# EAGLE board Localuino-v1 (EAGLE 5.07)
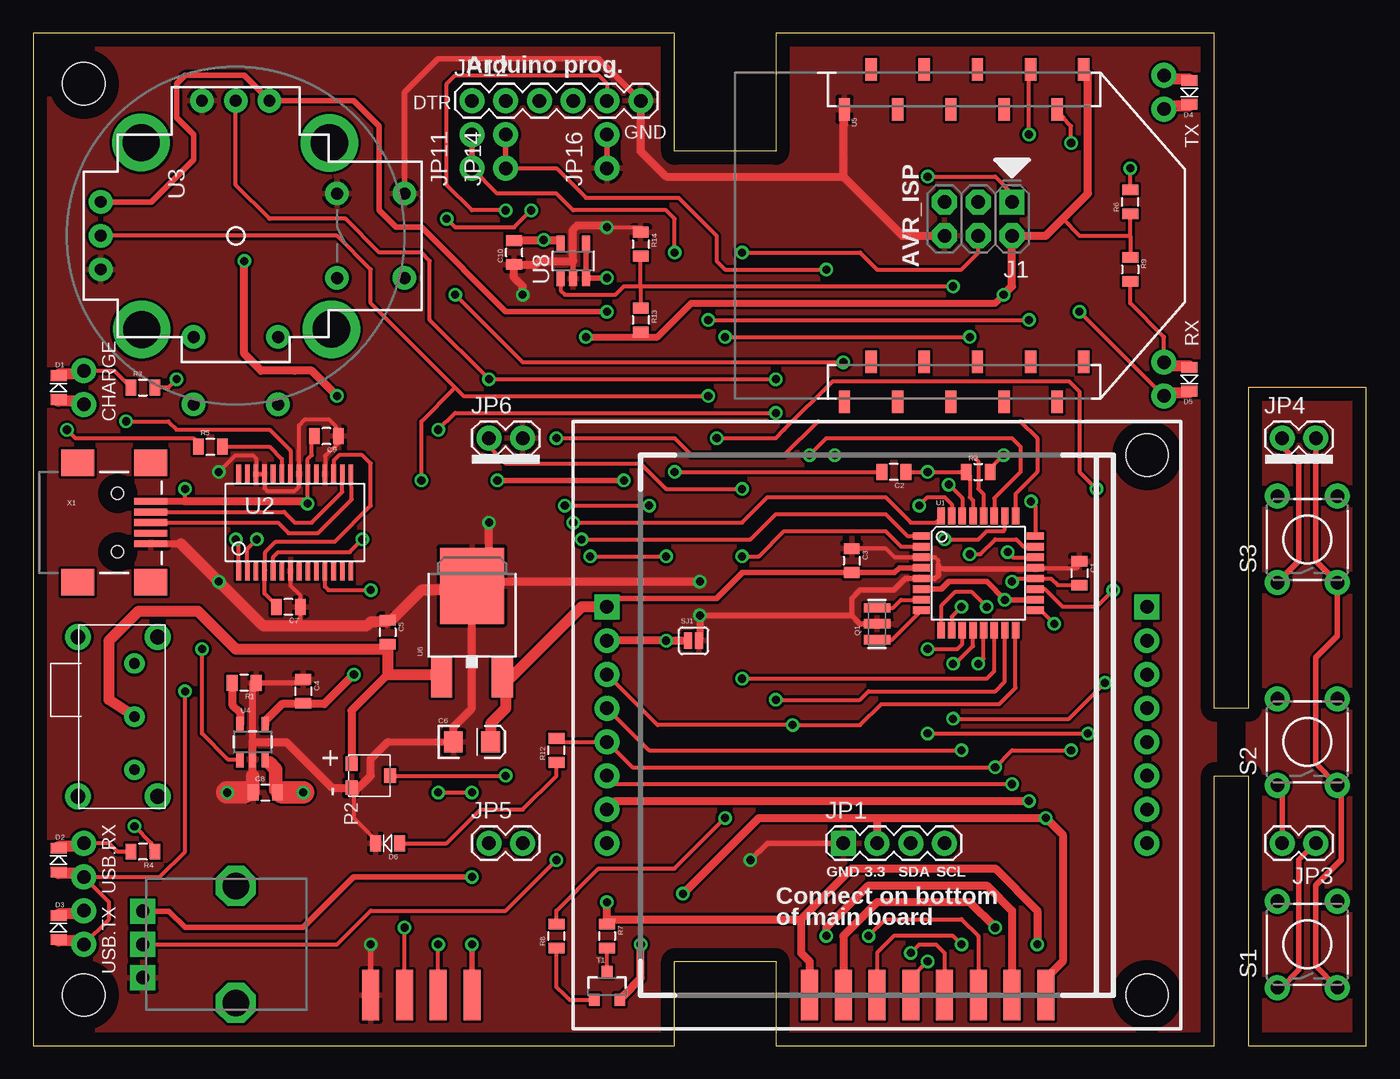
[diagram p0: board, top side]
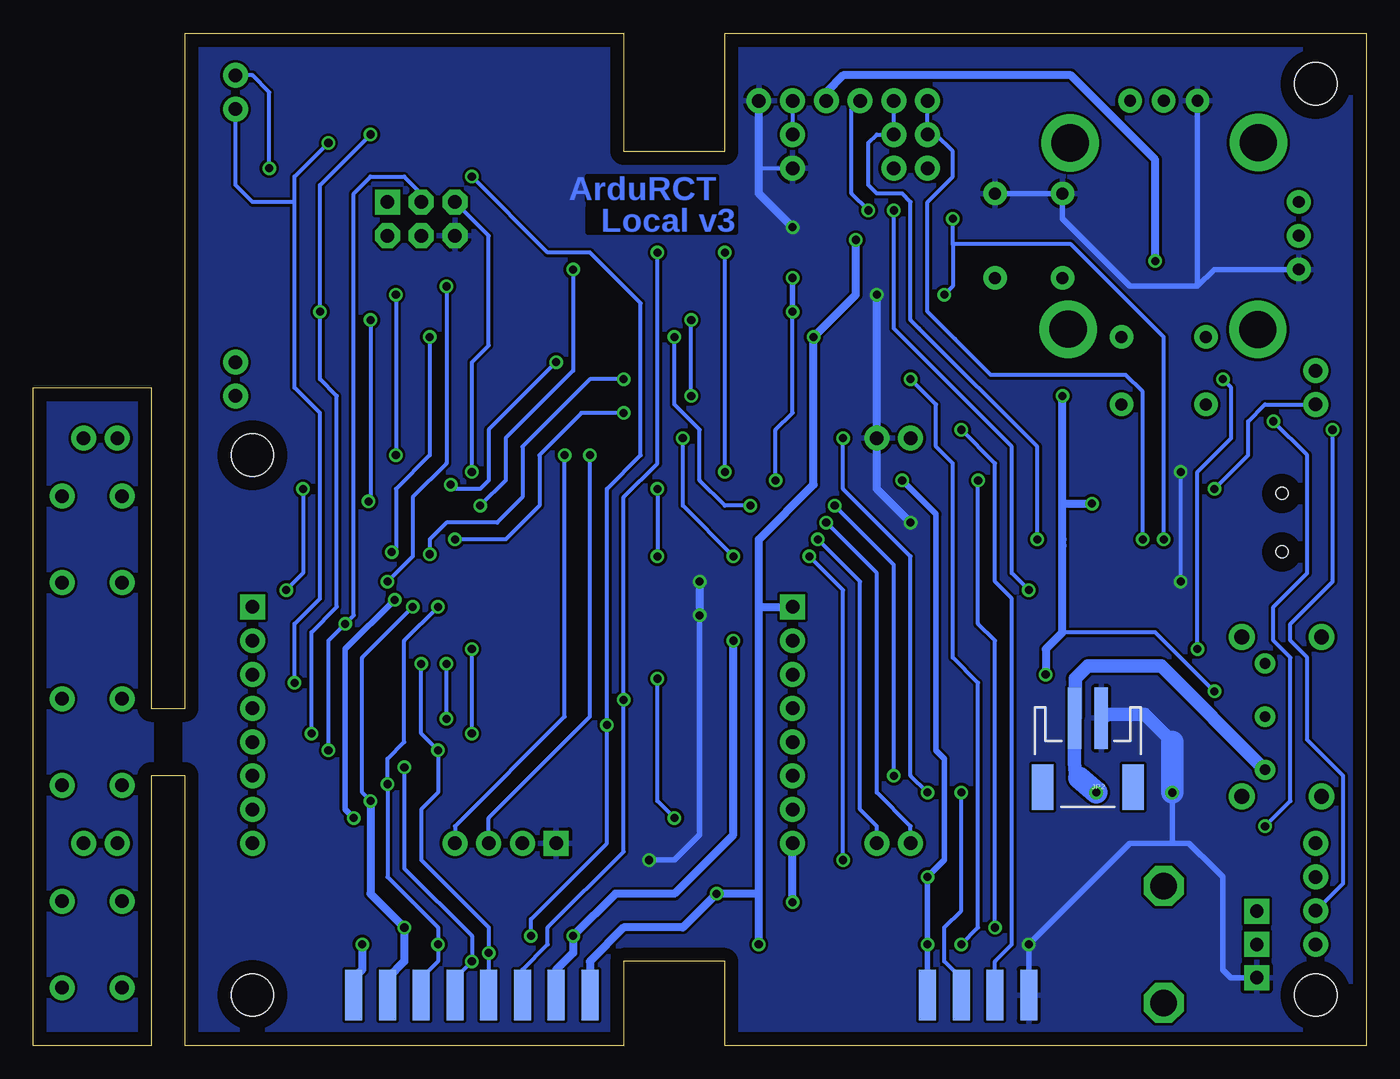
[diagram p1: board, bottom side, seen from below]

Size 100.32 x 76.2 mm. Coordinates in mm from the lower left corner, seen from the top.
Outline: 0,0 48.26,0 48.26,6.35 55.88,6.35 55.88,0 88.9,0 88.9,20.32 91.44,20.32 91.44,0 100.32,0 100.32,49.52 91.44,49.53 91.44,25.4 88.9,25.4 88.9,76.2 55.88,76.2 55.88,67.31 48.26,67.31 48.26,76.19 0,76.19 0,0
Copper layers (1*16): Top 0.035mm / dielectric 1.5mm / Bottom 0.035mm
Design rules "default": minimum track width 10mil, minimum drill 24mil, track to track 8mil, track to pad 8mil, pad to pad 8mil, via to via 8mil, smd to smd 8mil, copper to edge 40mil, drill to drill 8mil, minimum pad ring 10mil, minimum via ring 8mil, stop-mask expansion 4mil, vias tented up to drill 0mil, thermal gap 10mil
Net classes: 0 default: width 0.203 mm; 1 vcc: width 0.254 mm
Holes 3.2 mm at 3.81,72.39 3.81,3.81

## Footprints (pad centres in the part's own frame; a part is rotated, then mirrored left to right if it is on the bottom)
0805 = smd 0.8 x 1.2: 1 -0.9,0; 2 0.9,0
EIA3216 = smd 1.4 x 1.6: A 1.4,0; C -1.4,0
LED = smd 0.8 x 1.2: A -0.9,0; C 0.9,0 | drill 1.016 pad 1.88 round: A1 -1.27,-1.905; C1 1.27,-1.905
LED-0805 = smd 0.8 x 1.2: 1 -0.9,0; 2 0.9,0
2X3-NS = drill 1.016 pad 1.88 square: 1 -2.54,-1.27 | drill 1.016 pad 1.88 octagon: 2 -2.54,1.27; 3 0,-1.27; 4 0,1.27; 5 2.54,-1.27; 6 2.54,1.27
1X04 = drill 1.016 pad 1.88 square: 1 0,0 | drill 1.016 pad 1.88 round: 2 2.54,0; 3 5.08,0; 4 7.62,0
JST-2-SMD = smd 1 x 4.6: 1 -1,-3.7; 2 1,-3.7 | smd 1.6 x 3.4: NC1 -3.4,1.5; NC2 3.4,1.5
1X02 = drill 1.016 pad 1.88 round: 1 0,0; 2 2.54,0
1X8_SMD = smd 1.27 x 3.81: 1 0,0; 2 2.54,0; 3 5.08,0; 4 7.62,0; 5 10.16,0; 6 12.7,0; 7 15.24,0; 8 17.78,0
1X4_SMD = smd 1.27 x 3.81: 1 0,0; 2 2.54,0; 3 5.08,0; 4 7.62,0
1X2_CLOSED = drill 1.016 pad 1.88 round: 1 -1.27,0; 2 1.27,0
1X06 = drill 1.016 pad 1.88 round: 1 0,0; 2 2.54,0; 3 5.08,0; 4 7.62,0; 5 10.16,0; 6 12.7,0
ALPS_POT = drill 1 pad 1.88 square: P$1 7,-2.5; P$2 7,0; P$3 7,2.5 | drill 2 octagon: P$4 0,-4.4; P$5 0,4.4
TRIMPOT_TC33 = smd 1.1 x 0.9: 1 -0.91,-1.45; 2 0,1.45; 3 0.91,-1.45
RESONATOR-SMD = smd 0.7 x 2: 1 -1.2,0; 2 0,0; 3 1.2,0
TACTILE-PTH = drill 1.016 pad 1.88 round: 1 -3.251,2.261; 2 3.251,2.261; 3 -3.251,-2.261; 4 3.251,-2.261
EG1224 = drill 0.8 pad 1.524 round: 1 -4,0; 2 0,0; 3 4,0 | drill 1.1 pad 1.93 round: P$4 6,1.75; P$5 -6,1.75; P$6 -6,-4.25; P$7 6,-4.25
SJ_2S = smd 0.635 x 1.27: 1 -0.412,0; 2 0.412,0
SOT23-3 = smd 0.8 x 0.9: 1 -0.95,-1; 2 0.95,-1; 3 0,1.1
TQFP32-08 = smd 1.27 x 0.559: 1 -4.293,2.8; 2 -4.293,2; 3 -4.293,1.2; 4 -4.293,0.4; 5 -4.293,-0.4; 6 -4.293,-1.2; 7 -4.293,-2; 8 -4.293,-2.8; 17 4.293,-2.8; 18 4.293,-2; 19 4.293,-1.2; 20 4.293,-0.4; 21 4.293,0.4; 22 4.293,1.2; 23 4.293,2; 24 4.293,2.8 | smd 0.559 x 1.27: 9 -2.8,-4.293; 10 -2,-4.293; 11 -1.2,-4.293; 12 -0.4,-4.293; 13 0.4,-4.293; 14 1.2,-4.293; 15 2,-4.293; 16 2.8,-4.293; 25 2.8,4.293; 26 2,4.293; 27 1.2,4.293; 28 0.4,4.293; 29 -0.4,4.293; 30 -1.2,4.293; 31 -2,4.293; 32 -2.8,4.293
SSOP28DB = smd 0.348 x 1.397: 1 -4.225,-3.656; 2 -3.575,-3.656; 3 -2.925,-3.656; 4 -2.275,-3.656; 5 -1.625,-3.656; 6 -0.975,-3.656; 7 -0.325,-3.656; 8 0.325,-3.656; 9 0.975,-3.656; 10 1.625,-3.656; 11 2.275,-3.656; 12 2.925,-3.656; 13 3.575,-3.656; 14 4.225,-3.656; 15 4.225,3.656; 16 3.575,3.656; 17 2.925,3.656; 18 2.275,3.656; 19 1.625,3.656; 20 0.975,3.656; 21 0.325,3.656; 22 -0.325,3.656; 23 -0.975,3.656; 24 -1.625,3.656; 25 -2.275,3.656; 26 -2.925,3.656; 27 -3.575,3.656; 28 -4.225,3.656
JOYSTICK = drill 0.9 pad 1.778 round: B1A -3.175,12.7; B1B 3.175,12.7; B2A -3.175,7.62; B2A1 7.62,3.175; B2A2 12.7,3.175; B2A3 7.62,-3.175; B2A4 12.7,-3.175; B2B 3.175,7.62 | drill 0.889 pad 1.778 round: H1 -2.54,-10.16; H2 0,-10.16; H3 2.54,-10.16; V1 -10.16,2.54; V2 -10.16,0; V3 -10.16,-2.54 | drill 2.8 pad 4.318 round: P$1 7.061,-7.074; P$2 7.036,7.201; P$3 -6.985,7.048; P$4 -7.01,-7.125
SOT23-5 = smd 0.55 x 1.2: 1 -0.95,-1.3; 2 0,-1.3; 3 0.95,-1.3; 4 0.95,1.3; 5 -0.95,1.3
XBEE-SMD = smd 1.7 x 0.85: 1 -12.5,20; 2 -9.5,18; 3 -12.5,16; 4 -9.5,14; 5 -12.5,12; 6 -9.5,10; 7 -12.5,8; 8 -9.5,6; 9 -12.5,4; 10 -9.5,2; 11 12.5,2; 12 9.5,4; 13 12.5,6; 14 9.5,8; 15 12.5,10; 16 9.5,12; 17 12.5,14; 18 9.5,16; 19 12.5,18; 20 9.5,20
DPAK = smd 1.6 x 3: 1 -2.28,-5.31; 3 2.28,-5.31 | smd 4.826 x 5.715: 2 0,1.588
PCD8544 = drill 1.016 pad 1.88 square: 1 -8.89,-19.05; P1 -8.89,21.59 | drill 1.016 pad 1.88 round: 2 -6.35,-19.05; 3 -3.81,-19.05; 4 -1.27,-19.05; 5 1.27,-19.05; 6 3.81,-19.05; 7 6.35,-19.05; 8 8.89,-19.05; P2 -6.35,21.59; P3 -3.81,21.59; P4 -1.27,21.59; P5 1.27,21.59; P6 3.81,21.59; P8 8.89,21.59; P17 6.35,21.59 | hole 3.2: -20.32,21.59; 20.32,21.59
SOT23-5' = smd 0.6 x 1.2: 1 -0.95,-1.306; 2 0,-1.306; 3 0.95,-1.306; 4 0.95,1.306; 5 -0.95,1.306
USB-MINIB = smd 2.5 x 0.5: D+ 2.5,0; D- 2.5,0.8; GND 2.5,-1.6; ID 2.5,-0.8; VBUS 2.5,1.6 | smd 2.5 x 2: MTN1 -3,4.5; MTN2 2.5,4.5; MTN3 -3,-4.5; MTN4 2.5,-4.5 | hole 0.9: 0,2.2; 0,-2.2

## Placement (x,y rotation side)
C1  0.1uF  [0805]  78.74,35.56 270 top
C2  0.1uF  [0805]  64.77,43.18 180 top
C3  0.1uF  [0805]  61.59,36.51 270 top
C4  4.7uF  [0805]  20.32,26.67 270 top
C5  4.7uF  [0805]  26.67,31.11 270 top
C6  10uF  [EIA3216]  33.02,22.86 0 top
C7  0.1uF  [0805]  19.21,33.02 180 top
C8  4.7uF  [0805]  17.46,19.05 0 top
C9  0.1uF  [0805]  22.07,45.88 180 top
C10  0.1uF  [0805]  36.2,59.69 90 top
D1  Amber  [LED]  1.91,49.53 90 top
D2  Red  [LED]  1.91,13.97 90 top
D3  Green  [LED]  1.91,8.89 90 top
D4  Green  [LED]  87,71.75 270 top
D5  Red  [LED]  87,50.16 270 top
D6  Red  [LED-0805]  26.67,15.24 180 top
J1  AVR_SPI  [2X3-NS]  71.12,62.23 180 top
JP1  [1X04]  60.96,15.24 0 top
JP2  BAT  [JST-2-SMD]  20.95,20.95 180 bottom
JP3  [1X02]  96.52,15.24 180 top
JP4  [1X02]  93.98,45.72 0 top
JP5  [1X02]  34.29,15.24 0 top
JP6  [1X02]  34.29,45.72 0 top
JP7  BOTTOM  [1X8_SMD]  58.42,3.81 180 bottom
JP8  TOP  [1X8_SMD]  58.42,3.81 0 top
JP9  BOTTOM  [1X4_SMD]  33.02,3.81 0 bottom
JP10  TOP  [1X4_SMD]  33.02,3.81 180 top
JP11  JP_2_CLOSED  [1X2_CLOSED]  33.02,67.31 90 top
JP12  [1X06]  33.02,71.12 0 top
JP14  JP_2_CLOSED  [1X2_CLOSED]  35.56,67.31 90 top
JP16  JP_2_CLOSED  [1X2_CLOSED]  43.18,67.31 90 top
P1  [ALPS_POT]  15.24,7.62 180 top
P2  47K  [TRIMPOT_TC33]  25.4,20.32 270 top
Q1  8MHz  [RESONATOR-SMD]  63.5,31.75 90 top
R1  2K  [0805]  15.88,27.3 180 top
R2  10K  [0805]  71.12,43.18 0 top
R3  10K  [0805]  8.26,49.53 0 top
R4  1K  [0805]  8.26,14.61 180 top
R5  1K  [0805]  13.34,45.09 0 top
R6  1K  [0805]  82.55,63.5 90 top
R7  60  [0805]  43.18,8.26 270 top
R8  1K  [0805]  39.37,8.26 90 top
R9  1K  [0805]  82.55,58.42 270 top
R12  1K  [0805]  39.37,22.23 90 top
R13  10K  [0805]  45.72,54.61 270 top
R14  4K7  [0805]  45.72,60.33 270 top
S1  [TACTILE-PTH]  95.89,7.62 90 top
S2  [TACTILE-PTH]  95.89,22.86 90 top
S3  [TACTILE-PTH]  95.89,38.1 90 top
S4  EG1224  [EG1224]  7.62,24.77 270 top
SJ1  [SJ_2S]  49.69,30.48 0 top
T1  MMBT3906  [SOT23-3]  43.18,4.45 0 top
U1  ATMEGA368  [TQFP32-08]  71.12,35.56 0 top
U2  FT232RL-BASICSSOP  [SSOP28DB]  19.68,39.37 0 top
U3  JOYSTICKPTH  [JOYSTICK]  15.24,60.96 270 top
U4  MCP73831  [SOT23-5]  16.51,22.86 0 top
U5  XBEE-SIMPLE  [XBEE-SMD]  59.05,60.96 270 top
U6  LD39080DT33  [DPAK]  33.02,33.02 0 top
U7  PCD8544  [PCD8544]  62.23,24.13 270 top
U8  LMV321M5  [SOT23-5']  40.64,59.05 0 top
X1  USBSMD  [USB-MINIB]  6.35,39.37 0 top

## Library data of the parts
C1-C10 J1 JP1-JP6 JP12 P1 P2 Q1 R1-R9 R12-R14 S1-S3 SJ1 U1 U4 X1 = SparkFun
D1-D6 JP7-JP11 JP14 JP16 S4 T1 U2 U3 U5-U7 = wibauxl
U8 = linear

## Nets
3.3V: C3.2 C6.A C10.2 J1.2 JP1.2 JP7.1 JP8.8 R2.2 R6.1 R9.1 R13.2 T1.2 U1.4 U1.6 U1.18 U5.1 U6.3 U7.1 U8.5
A0: JP10.2 U1.23 U3.V2
A1: JP10.3 U1.24 U3.H2
A2: JP9.2 U1.25
A3: JP9.3 U1.26
A6: P1.P$2 U1.19
A7: P2.2 U1.22
AREF: C1.2 R13.1 R14.2 U1.20 U8.1
BAT_CH: C8.2 JP2.2 S4.3 U4.3
BL: JP7.8 JP8.1 R7.1 U7.8
BL_CMD: R8.2 U1.14
BUT_1: JP5.1 U1.32
BUT_2: JP5.2 U1.1
BUT_3: JP6.1 U1.2
DC/SCK: J1.3 JP7.5 JP8.4 R12.2 U1.17 U7.5
DIN: JP7.6 JP8.3 U1.10 U7.6
DTR: C2.2 JP11.1
GND [vcc]: C1.1 C3.1 C4.1 C5.1 C6.C C7.1 C8.1 C9.1 C10.1 D6.2 J1.6 JP1.1 JP2.1 JP6.2 JP9.4 JP10.4 JP12.6 JP16.1 P1.P$3 P2.3 Q1.2 R1.1 R14.1 SJ1.2 U1.3 U1.5 U1.21 U2.7 U2.18 U2.21 U2.25 U2.26 U3.B1A U3.B2A U3.H3 U3.V3 U4.2 U5.10 U6.2 U8.2 X1.GND
GND_BUTTONS: JP4.2 S1.3 S2.3 S3.3
GND_LCD [vcc]: JP7.2 JP8.7 SJ1.1 U7.2
N$1: Q1.1 U1.8
N$2: Q1.3 U1.7
N$3: JP3.1 S1.1
N$4: JP3.2 S2.1
N$5: JP4.1 S3.1
N$7: D6.1 R12.1
N$8: D1.C1 R3.1
N$9: U2.15 X1.D+
N$10: U2.16 X1.D-
N$12: R3.2 U4.1
N$13: R1.2 U4.5
N$14: D5.A1 R9.2
N$17: R7.2 T1.3
N$18: R5.2 U2.23
N$19: C7.2 U2.4 U2.17
N$22: R4.1 U2.22
N$25: D4.A1 R6.2
N$27: R8.1 T1.1
RESET: C2.1 J1.5 R2.1 U1.29
RST: JP7.4 JP8.5 U1.13 U7.4
SCE1/MISO: J1.1 JP8.6 U1.16 U7.3
SCE2/MOSI: J1.4 JP7.3 U1.15
SCL: JP1.4 U1.28
SCLK: JP7.7 JP8.2 U1.9 U7.7
SDA: JP1.3 U1.27
TX: JP14.1 U1.31
U_CTS: JP12.5 JP16.2 U2.11
U_DTR: JP11.2 JP12.1 U2.2
U_RX: JP12.2 JP14.2 U2.5
U_RX_LED: D2.C1 R4.2
U_TX: JP12.3 U1.30 U2.1
U_TX_LED: D3.C1 R5.1
VAN: JP9.1 JP10.1 P1.P$1 U3.H1 U3.V1 U8.3 U8.4
VBAT: C5.2 P2.1 S4.2 U6.1
VUSB: C4.2 C9.2 D1.A1 D2.A1 D3.A1 JP12.4 U2.20 U4.4 X1.VBUS
X_RX: D5.C1 U1.11 U5.3
X_TX: D4.C1 U1.12 U5.2

## Tracks (layer width: path | path; a pad name or v marks a point on that pad's centre or on a via)
3.3V  (via drill 0.61)
  Top 0.305: T1.2 44.13,3.5 | v73.03,44.45 72.07,43.5 72.02,43.45 R2.2 | 82.55,60.96 R9.1 | 76.2,60.96 77.47,62.23 78.74,60.96 82.55,60.96 | 82.55,62.87 R6.1 82.55,60.96 | 45.72,53.34 R13.2
  Top 0.406: U8.5 39.28,60.59 | U1.4 65.17,35.96 64.82,35.61 C3.2 53.39,35.61 51.44,33.66 43.81,33.66 U7.1 | U1.18 v73.12,33.56 71.75,34.92 68.9,34.92 68.33,34.36 U1.6
  Top 0.508: 72.02,43.45 72.12,43.45 72.07,43.5 | v41.59,53.34 45.72,53.34 46.99,53.34 49.53,55.88 72.39,55.88 v73.03,56.52
  Top 0.61: 39.28,60.59 C10.2 | 39.69,60.65 U8.5 39.69,60.64 v38.42,60.64 | 63.5,17.14 54.61,17.14 v48.9,11.43 | 44.13,3.5 44.45,3.81 45.72,5.08 v45.72,7.62 | 63.5,17.14 v76.2,17.14 77.47,15.88 77.47,6.35 76.2,5.08 JP8.8 | 63.5,17.14 JP1.2 | 79.02,73.38 79.02,73.3 U5.1 79.38,73.14 79.38,64.14 76.2,60.96 J1.2 73.66,57.15 v73.03,56.52
  Top 0.813: C6.A 34.42,24.26 35.56,25.4 35.56,27.3 | 35.56,27.3 35.56,27.45 U6.3 34.9,27.3 35.56,27.3 | U7.1 41.27,33.02 35.56,27.3
  Bottom 0.305: v73.03,56.52 v73.03,44.45
  Bottom 0.406: v73.12,33.56 76.83,29.84 76.83,17.78 v76.2,17.14
  Bottom 0.61: 45.72,33.02 45.72,38.1 41.59,42.23 v41.59,53.34 38.42,56.52 v38.42,60.64 | v45.72,7.62 45.72,11.43 | 45.72,11.43 v48.9,11.43 51.44,8.89 55.88,8.89 58.42,6.35 JP7.1 | 45.72,11.43 45.72,33.02 | 45.72,33.02 U7.1
A0  (via drill 0.61)
  Top 0.305: U1.23 74.52,37.56 73.98,38.1 72.39,38.1 71.28,36.99 v70.48,36.99 | v55.88,50.16 v34.29,50.16 29.84,54.61 29.84,59.05 29.21,59.69 26.04,59.69 23.5,62.23 17.78,62.23 15.24,64.77 U3.V2 | JP10.2 v30.48,7.62
  Bottom 0.305: v34.29,50.16 32.38,48.26 32.38,45.09 31.11,43.81 31.11,29.21 29.21,27.3 29.21,8.89 v30.48,7.62 | v70.48,36.99 70.48,38.1 69.22,39.37 65.41,39.37 63.5,41.27 63.5,45.09 58.42,50.16 v55.88,50.16
A1  (via drill 0.61)
  Top 0.305: U3.H2 22.86,60.96 25.4,58.42 25.4,55.88 31.75,49.53 | 31.75,49.53 32.38,48.9 v50.8,48.9 | v75.09,40.96 75.41,40.64 75.41,40.63 U1.24 | v50.8,54.61 v74.93,54.61 | JP10.3 v27.94,8.89 | v29.21,42.55 29.21,46.99 31.75,49.53
  Bottom 0.305: v74.93,54.61 74.93,41.12 v75.09,40.96 | v75.09,40.96 | v50.8,48.9 v50.8,54.61 | v27.94,8.89 27.94,30.48 29.21,31.75 v29.21,42.55
A2  (via drill 0.61)
  Top 0.305: U1.25 73.92,41.53 75.56,43.18 75.56,45.72 74.3,46.99 59.05,46.99 56.52,44.45 49.53,44.45 48.26,45.72 v39.37,45.72 | v30.48,19.05 v33.02,19.05
  Bottom 0.305: v39.37,45.72 39.37,41.91 34.29,36.83 34.29,20.32 v33.02,19.05 | v30.48,19.05 30.48,10.16 31.75,8.89 31.75,6.35 30.48,5.08 JP9.2
A3  (via drill 0.61)
  Top 0.305: U1.26 73.12,38.83 73.03,38.73 71.75,38.73 71.12,38.1 v68.58,38.1 | v55.88,47.62 31.75,47.62 v30.48,46.35
  Bottom 0.305: v68.58,38.1 64.77,38.1 62.23,40.64 62.23,44.45 59.05,47.62 v55.88,47.62 | JP9.3 27.94,6.35 26.67,7.62 26.67,33.66 27.94,34.92 27.94,43.81 v30.48,46.35
A6  (via drill 0.61)
  Top 0.305: P1.P$2 22.86,7.62 25.4,10.16 35.56,10.16 v39.37,13.97 | v41.91,36.83 v47.62,36.83 | U1.19 76.13,34.36 77.47,33.02 80.01,33.02 v81.28,34.29 | v51.44,45.72 55.88,45.72 56.52,46.35 60.17,50.01 77.95,50.01 78.74,49.21 78.74,43.18 v80.01,41.91
  Bottom 0.305: v39.37,13.97 39.37,34.29 v41.91,36.83 | v81.28,34.29 80.01,35.56 v80.01,41.91 | v47.62,36.83 51.44,40.64 v51.44,45.72
A7  (via drill 0.61)
  Top 0.305: 26.67,20.32 P2.2 v35.56,20.32 | v40.01,40.64 v46.35,40.64 | U1.22 73.73,36.76 v73.34,37.15 | v52.07,53.34 v70.48,53.34
  Bottom 0.305: v35.56,20.32 35.56,36.2 v40.01,40.64 | v73.34,37.15 73.03,37.47 73.03,41.91 70.48,44.45 v70.48,53.34 | v52.07,53.34 52.07,48.26 50.16,46.35 50.16,42.55 48.26,40.64 v46.35,40.64
AREF  (via drill 0.61)
  Top 0.305: U8.1 39.69,56.83 40.01,56.52 43.81,56.52 44.45,57.15 45.72,57.15 | C1.2 77.1,34.66 76.6,35.16 U1.20 73.89,35.16 v73.66,34.92 | 45.72,57.15 v69.22,57.15 | 45.72,57.15 R13.1 | 45.72,57.15 R14.2
  Bottom 0.305: v73.66,34.92 71.75,36.83 71.75,41.27 69.22,43.81 v69.22,57.15
BAT_CH  (via drill 0.61)
  Top 0.406: 17.46,21.27 U4.3
  Top 0.61: C8.2 18.26,19.26 18.73,19.05 | 17.78,21.27 17.46,21.27
  Top 1.016: 18.26,19.26 18.26,20.8 17.78,21.27
  Top 1.676: v20.32,19.05 18.73,19.05
  Bottom 1.016: 21.59,20.16 21.91,20.48 21.95,21.32 JP2.2 21.91,24.7 21.91,27.62 20.95,28.57 15.43,28.57 S4.3
  Bottom 1.676: 21.59,20.16 v20.32,19.05
BL  (via drill 0.61)
  Top 0.61: 57.78,9.53 61.59,13.34 72.39,13.34 75.56,10.16 v75.56,7.62 | 57.78,9.53 57.78,6.99 58.42,6.35 JP8.1 | R7.1 43.18,9.53 | 43.18,9.53 v43.18,10.79 | 43.18,9.53 57.78,9.53
  Bottom 0.305: 76.2,5.08 JP7.8
  Bottom 0.61: v75.56,7.62 75.56,5.71 76.2,5.08 | v43.18,10.79 U7.8
BL_CMD  (via drill 0.61)
  Top 0.305: R8.2 39.37,10.16 42.55,13.34 48.26,13.34 v52.07,17.14 | U1.14 72.32,28.19 71.75,27.62 v53.34,27.62
  Bottom 0.305: v52.07,17.14 53.34,18.41 v53.34,27.62
BUT_1  (via drill 0.61)
  Top 0.305: U1.32 68.32,39.74 67.94,39.37 66.04,39.37 64.14,41.27 55.24,41.27 53.34,39.37 v40.64,39.37
  Bottom 0.305: JP5.1 34.29,16.51 36.83,19.05 36.83,35.56 v40.64,39.37
BUT_2  (via drill 0.61)
  Top 0.305: U1.1 65.78,38.36 64.14,40.01 55.88,40.01 53.98,38.1 v41.27,38.1
  Bottom 0.305: JP5.2 36.83,16.51 38.1,17.78 38.1,34.92 v41.27,38.1
BUT_3  (via drill 0.61)
  Top 0.305: JP6.1 34.29,45.09 35.56,43.81 45.72,43.81 47.62,41.91 v53.34,41.91 | U1.2 65.31,37.56 64.14,38.73 56.52,38.73 54.61,36.83 v53.34,36.83
  Bottom 0.305: v53.34,41.91 v53.34,36.83
DC/SCK  (via drill 0.61, 0.61 pad 0.61)
  Top 0.305: JP8.4 66.04,5.08 v67.31,6.35 | v78.11,22.23 73.66,22.23 v72.39,20.95 45.09,20.95 U7.5 39.74,22.86 R12.2 | U1.17 75.89,32.7 v76.83,31.75
  Bottom 0.305: JP7.5 68.58,5.08 v67.31,6.35 67.31,8.26 72.39,13.34 v72.39,20.95 | v78.11,22.23 78.11,30.48 v76.83,31.75 76.2,32.38 76.2,64.14 74.93,65.41 72.39,65.41 71.12,64.14 J1.3
DIN  (via drill 0.61)
  Top 0.305: v69.85,7.62 69.22,8.26 64.77,8.26 63.5,6.99 JP8.3 | U7.6 43.81,19.68 v73.66,19.68 | U1.10 69.12,32.29 v69.85,33.02
  Bottom 0.305: JP7.6 71.12,5.08 69.85,6.35 v69.85,7.62 69.85,8.89 73.66,12.7 v73.66,19.68 73.66,21.59 72.39,22.86 72.39,30.48 v69.85,33.02
DTR  (via drill 0.61)
  Top 0.305: v48.26,43.18 C2.2 | v48.26,59.69 48.26,62.23 47.62,62.87 40.64,62.87 39.37,64.14 34.92,64.14 JP11.1
  Bottom 0.305: v48.26,43.18 v48.26,59.69
GND  (via drill 0.61)
  Top 0.305: v13.97,43.18 15.24,44.45 16.51,44.45 16.76,44.2 U2.26 U2.25 17.41,41.96 17.62,41.75 19.68,41.75 20.01,42.08 U2.21 20,46.67 20.48,47.15 22.23,47.15 22.75,46.62 22.75,45.77 C9.1 22.97,45.45 23.02,45.4 21.96,44.4 U2.18 | C1.1 78.61,35.96 U1.21 75.25,35.88 75.09,36.04 75.41,36.04 74.93,35.88 | C3.1 64.19,37.41 64.84,36.76 U1.3 67.86,36.76 68.1,36.51 68.1,36.2 68.34,35.96 68.18,35.96 | 19.68,31.59 20.69,31.86 | D6.2 25.77,15.51 24.13,17.14 24.13,19.23 P2.3 | R14.1 45.72,61.59 v43.18,61.59 | U2.7 19.36,34.62 20.11,33.87 C7.1 20.11,31.54 21.59,31.59
  Top 0.406: 61.03,70.48 U5.10 | 40.64,59.05 U8.2 | C8.1 16.56,19.16 | 16.77,27.57 R1.1 20.69,27.3 C4.1 | C6.C 31.75,22.73 | Q1.2 62.23,31.75 61.59,32.38 | 61.59,32.38 61.59,33.66 62.23,34.29 64.77,34.29 65.64,35.16 U1.5 67.86,35.16 68.1,35.4 68.1,36.2 | v50.16,32.38 61.59,32.38 | 68.18,35.96 68.58,35.88 74.93,35.88 | JP1.1 55.24,15.24 v53.98,13.97 | U3.B1A 27.94,71.75 30.48,74.3 42.55,74.3 JP12.6 | v25.4,7.62 JP10.4
  Top 0.508: 16.77,27.57 16.51,27.3 16.51,22.86 | 26.67,22.86 C6.C | 11.12,37.77 X1.GND | v50.16,32.38 50.16,30.57 SJ1.2
  Top 0.61: 60.96,65.41 47.62,65.41 45.72,67.31 JP12.6 | 60.96,65.41 61.03,70.48 | 16.51,20.32 U4.2 16.51,22.86 19.05,22.86 22.5,19.41 P2.3 24.23,19.05 24.13,19.05 25.4,20.32 25.4,21.59 26.67,22.86 | C6.C 31.62,24 33.02,25.4 U6.2 | v43.18,61.59 42.86,61.75 40.96,61.75 40.64,61.44 40.64,59.05 38.1,59.05 37.84,58.79 C10.1 36.2,57.78 36.83,57.15 v36.83,56.52 | 19.68,31.59 19.53,31.59 | v34.29,39.37 34.29,36.2 U6.2 | C5.1 26.56,31.91 | U5.10 60.96,70.46 60.96,65.41 | 60.96,65.41 65.41,60.96 J1.6 | U6.2 32.7,34.61 34.29,34.92 v50.16,34.92
  Top 0.813: C5.1 26.93,32.02 29.21,34.29 32.7,34.29 U6.2 | 11.12,37.77 14.61,34.29 v13.97,34.92 17.3,31.59 18.89,31.59 19.53,31.59 | 19.68,31.59 20.16,31.59 21.59,31.59 25.08,31.59 25.4,31.91 26.56,31.91
  Top 1.016: 16.56,19.16 16.51,20.32 | 15.87,19.05 C8.1
  Top 1.676: v14.61,19.05 15.87,19.05
  Bottom 0.305: v13.97,34.92 v13.97,43.18 | 45.72,66.04 JP16.1
  Bottom 0.406: P1.P$3 10.2,5.12 10.79,5.71 10.79,12.7 11.43,13.34 13.34,15.24 14.61,15.24 | v50.16,32.38 50.16,15.88 52.07,13.97 v53.98,13.97 | 14.61,15.24 v14.61,19.05 | U3.B1A U3.B2A 22.86,62.23 17.78,57.15 12.7,57.15 | 14.61,15.24 17.78,15.24 v25.4,7.62 JP10.4 | 12.7,57.15 11.43,58.42 U3.H3 | 12.7,57.15 U3.V3
  Bottom 0.61: v36.83,56.52 JP6.2 36.83,41.91 v34.29,39.37 | v43.18,61.59 45.72,64.14 45.72,66.04 JP12.6 | v50.16,34.92 v50.16,32.38
  Bottom 1.016: JP2.1 19.37,24.92 16.67,24.92 14.61,22.86
  Bottom 1.676: v14.61,19.05 14.61,22.86
  pour Bottom: 0,76.2 88.9,76.2 88.9,0 0,0
  pour Top: 0,76.2 88.9,76.2 88.9,0 0,0
GND_BUTTONS
  Top 0.305: 98.15,19.33 S2.3
  Top 0.406: S2.3 96.52,21.23 96.52,29.21 98.15,30.84 S3.3 96.52,36.47 JP4.2 | 98.15,19.33 98.42,19.05 98.42,13.97 96.52,12.06 96.52,5.99 S1.3
GND_LCD  (via drill 0.61)
  Top 0.61: U7.2 v47.62,30.48 SJ1.1 | JP8.7 73.66,10.16 71.75,12.06 62.87,12.06 59.69,8.89 v59.69,8.26
  Bottom 0.61: JP7.2 60.96,5.71 59.69,6.99 v59.69,8.26 56.52,11.43 52.07,11.43 47.62,15.88 v47.62,30.48
N$1
  Top 0.305: Q1.1 64.62,30.55 U1.8
N$2
  Top 0.305: 63.57,33.02 Q1.3 64.7,32.95 65.31,33.56 U1.7
N$3
  Top 0.406: S1.1 93.94,4.41 95.25,5.71 95.25,13.97 JP3.1
N$4
  Top 0.406: JP3.2 93.98,19.33 S2.1
N$5
  Top 0.406: JP4.1 93.98,45.09 95.25,43.81 95.25,36.47 S3.1
N$6
  pour Bottom: 91.44,49.53 100.33,49.53 100.33,0 91.44,0
N$7
  Top 0.305: R12.1 39.37,20.32 36.83,17.78 33.66,17.78 31.11,15.24 D6.1
N$8
  Top 0.305: D1.C1 6.08,50.8 R3.1
N$9
  Top 0.305: X1.D+ 18.41,39.37 19.21,38.58 21.43,38.58 23.5,40.64 23.97,41.12 23.91,43.08 U2.15
N$10
  Top 0.305: X1.D- 18.89,40.17 19.68,39.37 20.95,39.37 23.26,41.67 U2.16
N$12  (via drill 0.61)
  Top 0.305: U4.1 14.63,21.56 12.7,23.5 v12.7,29.84 | v10.79,50.16 10.16,49.53 R3.2
  Bottom 0.305: v12.7,29.84 12.7,43.18 10.16,45.72 10.16,49.53 v10.79,50.16
N$13
  Top 0.61: U4.5 15.56,25.08 14.97,25.66 R1.2
N$14
  Top 0.305: R9.2 82.55,55.88 85.09,53.34 D5.A1
N$15
  pour Top: 91.44,49.53 100.33,49.53 100.33,0 91.44,0
N$17
  Top 0.305: 43.18,5.71 T1.3 R7.2
N$18
  Top 0.305: U2.23 18.71,44.16 17.78,45.09 R5.2
N$19
  Top 0.305: C7.2 18.41,33.02 17.41,34.02 U2.4 17.46,35.77 17.46,37.15 18.26,37.94 22.7,37.94 25.4,40.64 25.4,43.81 24.77,44.45 23.02,44.45 22.61,44.04 U2.17
N$22  (via drill 0.61)
  Top 0.305: U2.22 19.36,44.77 17.78,46.35 10.79,46.35 10.16,46.99 v6.99,46.99 | v7.62,16.51 8.89,15.24 8.89,14.87 R4.1
  Bottom 0.305: v7.62,16.51 5.71,18.41 5.71,29.21 6.99,30.48 6.99,33.02 4.45,35.56 4.45,44.45 v6.99,46.99
N$25  (via drill 0.61)
  Top 0.305: R6.2 v82.55,66.04
  Bottom 0.305: v82.55,66.04 82.55,71.75 83.82,73.03 D4.A1
N$27
  Top 0.305: R8.1 39.37,4.4 40.01,3.81 40.37,3.44 T1.1
RESET  (via drill 0.61)
  Top 0.305: C2.1 v67.31,43.18 R2.1 70.48,42.91 70.48,41.27 70.72,41.04 U1.29
  Bottom 0.305: J1.5 66.04,60.96 66.04,52.7 67.31,51.44 v67.31,43.18
RST  (via drill 0.61)
  Top 0.305: JP8.5 68.58,6.99 67.94,7.62 66.67,7.62 v66.04,6.99 | U7.4 46.35,22.23 v69.85,22.23 | U1.13 71.52,29.13 v71.12,28.73
  Bottom 0.305: JP7.4 v66.04,6.99 66.04,8.89 71.12,13.97 71.12,17.78 69.85,19.05 v69.85,22.23 71.12,23.5 v71.12,28.73
SCE1/MISO  (via drill 0.61, 0.61 pad 0.61)
  Top 0.305: JP8.6 71.12,8.26 69.85,9.53 64.14,9.53 v62.87,8.26 | U7.3 46.99,24.13 v57.15,24.13 62.23,24.13 63.82,25.72 72.71,25.72 73.92,26.93 U1.16 | J1.1 73.66,64.14 72.39,65.41 v67.31,65.41
  Bottom 0.305: v62.87,8.26 62.87,9.53 57.15,15.24 v57.15,24.13 57.15,41.91 54.61,44.45 54.61,55.88 58.42,59.69 61.59,59.69 v67.31,65.41
SCE2/MOSI  (via drill 0.61, 0.61 pad 0.61)
  Top 0.305: v55.88,26.04 62.23,26.04 62.87,26.67 72.39,26.67 73.12,27.4 U1.15 | J1.4 71.12,59.69 69.85,58.42 63.5,58.42 62.23,59.69 v53.34,59.69
  Bottom 0.305: JP7.3 63.5,5.71 61.59,7.62 61.59,8.89 55.88,14.61 v55.88,26.04 55.88,41.27 53.34,43.81 v53.34,59.69
SCL  (via drill 0.61)
  Top 0.305: v60.33,44.45 70.64,44.45 71.12,43.97 71.12,41.91 71.52,41.51 U1.28
  Bottom 0.305: v60.33,44.45 60.33,24.77 68.58,16.51 JP1.4
SCLK  (via drill 0.61)
  Top 0.305: U1.9 68.32,33.08 69.37,34.13 70.64,34.13 v71.75,33.02
  Top 0.61: JP8.2 60.96,8.26 63.5,10.79 70.48,10.79 v72.39,8.89 | v74.93,18.41 43.81,18.41 U7.7
  Bottom 0.305: 73.66,5.08 JP7.7 | v71.75,33.02 75.56,29.21 75.56,19.05 v74.93,18.41
  Bottom 0.61: 73.66,5.08 72.39,6.35 v72.39,8.89 74.93,11.43 v74.93,18.41
SDA  (via drill 0.61)
  Top 0.305: U1.27 72.32,41.2 74.3,43.18 74.3,45.09 73.66,45.72 59.69,45.72 v58.42,44.45
  Bottom 0.305: v58.42,44.45 58.42,24.77 66.04,17.14 JP1.3
TX  (via drill 0.61, 0.61 pad 0.61)
  Top 0.305: JP14.1 39.37,66.04 41.59,63.82 48.58,63.82 51.44,60.96 51.44,59.05 52.07,58.42 v59.69,58.42 | v66.67,40.64 67.31,41.27 68.58,41.27 69.12,40.73 U1.31
  Bottom 0.305: v66.67,40.64 64.77,42.55 64.77,45.72 59.69,50.8 v59.69,58.42
U_CTS  (via drill 0.61)
  Top 0.305: U2.11 21.96,34.55 22.23,34.29 v25.4,34.29 | v35.56,62.87 33.02,62.87 31.11,64.77 31.11,72.39 31.75,73.03 42.55,73.03 43.18,72.39 JP12.5
  Bottom 0.305: v25.4,34.29 26.67,35.56 26.67,45.09 35.56,53.98 v35.56,62.87 | JP12.5 JP16.2
U_DTR  (via drill 0.61)
  Top 0.305: U2.2 16.11,37.38 v16.83,38.1
  Bottom 0.305: v16.83,38.1 16.83,49.21 18.1,50.48 28.26,50.48 31.59,53.82 | 31.59,53.82 30.96,53.18 | 31.59,53.82 33.02,55.24 33.02,63.5 31.11,65.41 31.11,67.31 32.38,68.58 JP11.2 JP12.1
U_RX  (via drill 0.61)
  Top 0.305: U2.5 18.06,36.79 18.41,37.15 23.81,37.15 v24.77,38.1
  Bottom 0.305: v24.77,38.1 24.77,45.09 33.66,53.98 33.5,53.82 34.29,54.61 34.29,63.5 34.92,64.14 36.83,64.14 37.47,64.77 37.47,67.94 36.83,68.58 JP14.2 JP12.2
U_RX_LED
  Top 0.305: D2.C1 5.71,15.24 6.35,14.61 R4.2
U_TX  (via drill 0.61)
  Top 0.305: U2.1 15.46,37.88 v15.24,38.1 | v31.11,62.23 31.75,61.59 36.2,61.59 v37.47,62.87 | v31.75,56.52 36.83,51.44 v60.96,51.44 | U1.30 69.92,41.2 v68.9,42.23
  Bottom 0.305: v15.24,38.1 15.24,53.34 22.23,60.33 31.11,60.33 | 31.11,60.33 31.11,57.15 v31.75,56.52 | 31.11,60.33 v31.11,62.23 | v37.47,62.87 38.73,64.14 38.73,70.48 JP12.3 | v68.9,42.23 68.58,41.91 66.67,41.91 66.04,42.55 66.04,46.35 v60.96,51.44
U_TX_LED  (via drill 0.61)
  Top 0.305: R5.1 12.44,45.35 12.06,45.72 3.17,45.72 v2.54,46.35
  Bottom 0.305: D3.C1 1.75,12.22 1.75,20.32 4.45,23.02 4.45,29.21 5.71,30.48 5.71,31.75 2.54,34.92 v2.54,46.35
VAN  (via drill 0.61)
  Top 0.305: U8.3 41.63,57.78
  Top 0.406: v33.02,7.62 JP10.1 | P1.P$1 10.2,10.12 11.43,8.89 20.32,8.89 24.13,12.7 v33.02,12.7 | U3.H1 8.89,63.5 12.06,66.67 12.06,68.58 10.79,69.85 10.79,72.39 11.43,73.03 15.88,73.03 U3.V1 24.13,71.12 26.04,69.22 26.04,62.87 27.3,61.59 29.21,61.59 35.56,55.24 v43.18,55.24 | 41.59,58.1 U8.4 41.63,59.69 | v44.45,42.55 v44.45,42.54 v44.45,42.55 | v43.18,57.78 41.91,57.78 41.59,58.1 | 41.59,58.1 U8.3 | v34.92,42.55 v44.45,42.55
  Bottom 0.305: v44.45,42.55 44.45,46.35 43.18,47.62 v43.18,55.24
  Bottom 0.406: JP10.1 v33.02,7.62 v33.02,12.7 31.75,13.97 31.75,21.59 32.38,22.23 32.38,40.01 v34.92,42.55 | v43.18,55.24 v43.18,57.78
VBAT
  Top 0.61: P2.1 23.95,25.22 26.67,27.94 | 30.51,27.94 U6.1
  Top 0.813: 30.51,27.94 26.67,27.94 C5.2 26.41,29.84 15.24,29.84 12.38,32.7 7.94,32.7 5.71,30.48 5.71,26.04 S4.2
VUSB  (via drill 0.61)
  Top 0.305: 11.43,40.97 v11.43,41.91 | D3.A1 5.71,9.53 5.71,10.79 D2.A1 9.53,12.7 11.43,14.61 v11.43,26.67 | v20.64,40.8 20.66,40.82 U2.20 20.66,44.16 20.95,44.45 20.95,45.83 C9.2
  Top 0.508: 11.43,40.97 X1.VBUS
  Top 0.61: U4.4 17.46,24.45 18.73,25.72 20.27,25.72 C4.2 20.32,25.88 20.64,25.72 21.91,25.72 v24.13,27.94 | v20.64,40.8 20.48,40.96 11.43,40.97 | v15.88,59.05 15.88,52.07 17.14,50.8 19.68,50.8 20.95,50.8 v22.86,48.9
  Bottom 0.305: D1.A1 7.62,48.26 8.89,46.99 8.89,44.45 v11.43,41.91 | v11.43,26.67 15.88,31.11 22.86,31.11
  Bottom 0.508: 20.62,40.81 v20.64,40.8
  Bottom 0.61: 22.86,38.1 22.86,37.62 22.86,31.11 24.13,29.84 v24.13,27.94 | 22.86,38.1 22.86,40.64 22.7,40.8 20.95,40.8 20.62,40.81 | JP12.4 40.64,71.75 39.37,73.03 22.23,73.03 15.88,66.67 v15.88,59.05 | 22.86,38.1 v22.86,48.9 | 22.86,38.1
X_RX  (via drill 0.61, 0.61 pad 0.61)
  Top 0.305: v78.74,55.24 D5.C1 | U1.11 69.92,30.23 69.53,29.84 v67.31,29.84 | v67.31,23.5 v79.38,23.5 | v74.93,68.58 74.93,73.03 U5.3
  Bottom 0.305: v79.38,23.5 79.38,31.11 77.47,33.02 77.47,48.9 78.74,50.16 v78.74,55.24 78.74,64.77 v74.93,68.58 | v67.31,23.5 v67.31,29.84
X_TX  (via drill 0.61, 0.61 pad 0.61)
  Top 0.305: 77.08,70.48 77.47,69.85 78.11,69.22 v78.11,67.94 | U1.12 70.72,30.08 69.37,28.73 v69.22,28.73 | v69.22,24.61 77.95,24.61 v80.64,27.3
  Top 0.406: 77.08,70.48 U5.2 77.44,69.83 77.47,69.85
  Bottom 0.305: v80.64,27.3 80.64,31.75 78.74,33.66 78.74,47.62 80.64,49.53 80.64,63.5 | 80.64,63.5 80.64,65.41 v78.11,67.94 | v69.22,24.61 v69.22,28.73 | D4.C1 85.09,64.77 83.82,63.5 80.64,63.5

## Text on the board
Bottom: ArduRCT | Local v3
tPlace: Arduino prog. | DTR | TX | GND | AVR_ISP | RX | CHARGE | + | - | GND | 3.3 | SDA | SCL | USB.RX | Connect on bottom | of main board | USB.TX